# Altium PCB TankMotorTab.PcbDoc
Units mm, origin at the board's own origin, x right, y up, seen from the top; angles counter-clockwise.
Board outline 22 x 31 mm, 2 copper layers (TL, BL), stack 0.872 mm thick; 2 components, 0 nets, 2 pads, 0 vias.
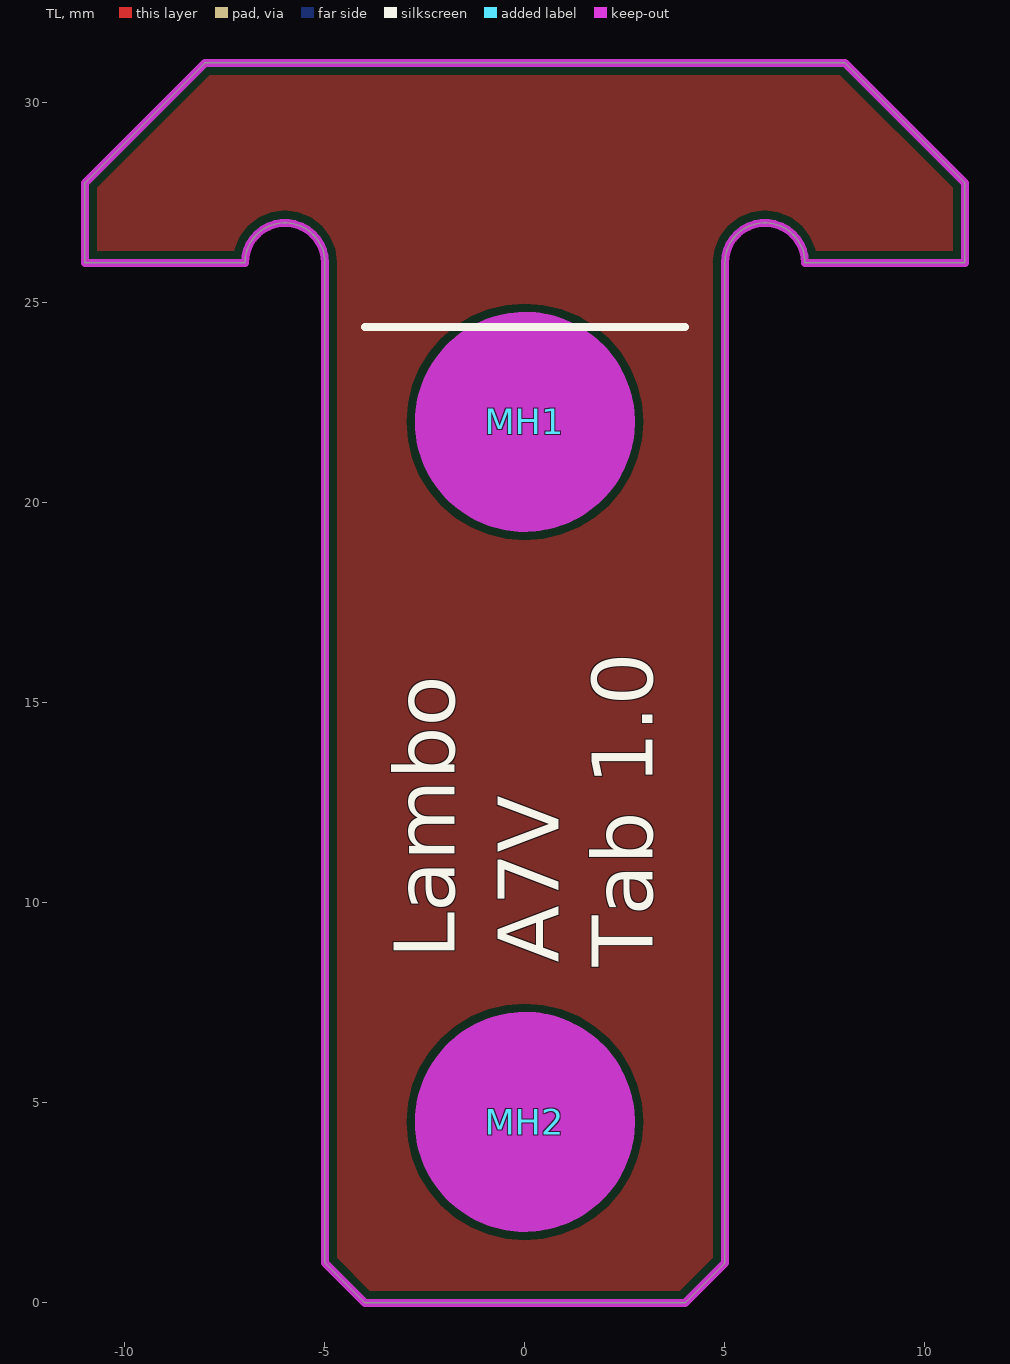
[diagram p0: TL view]
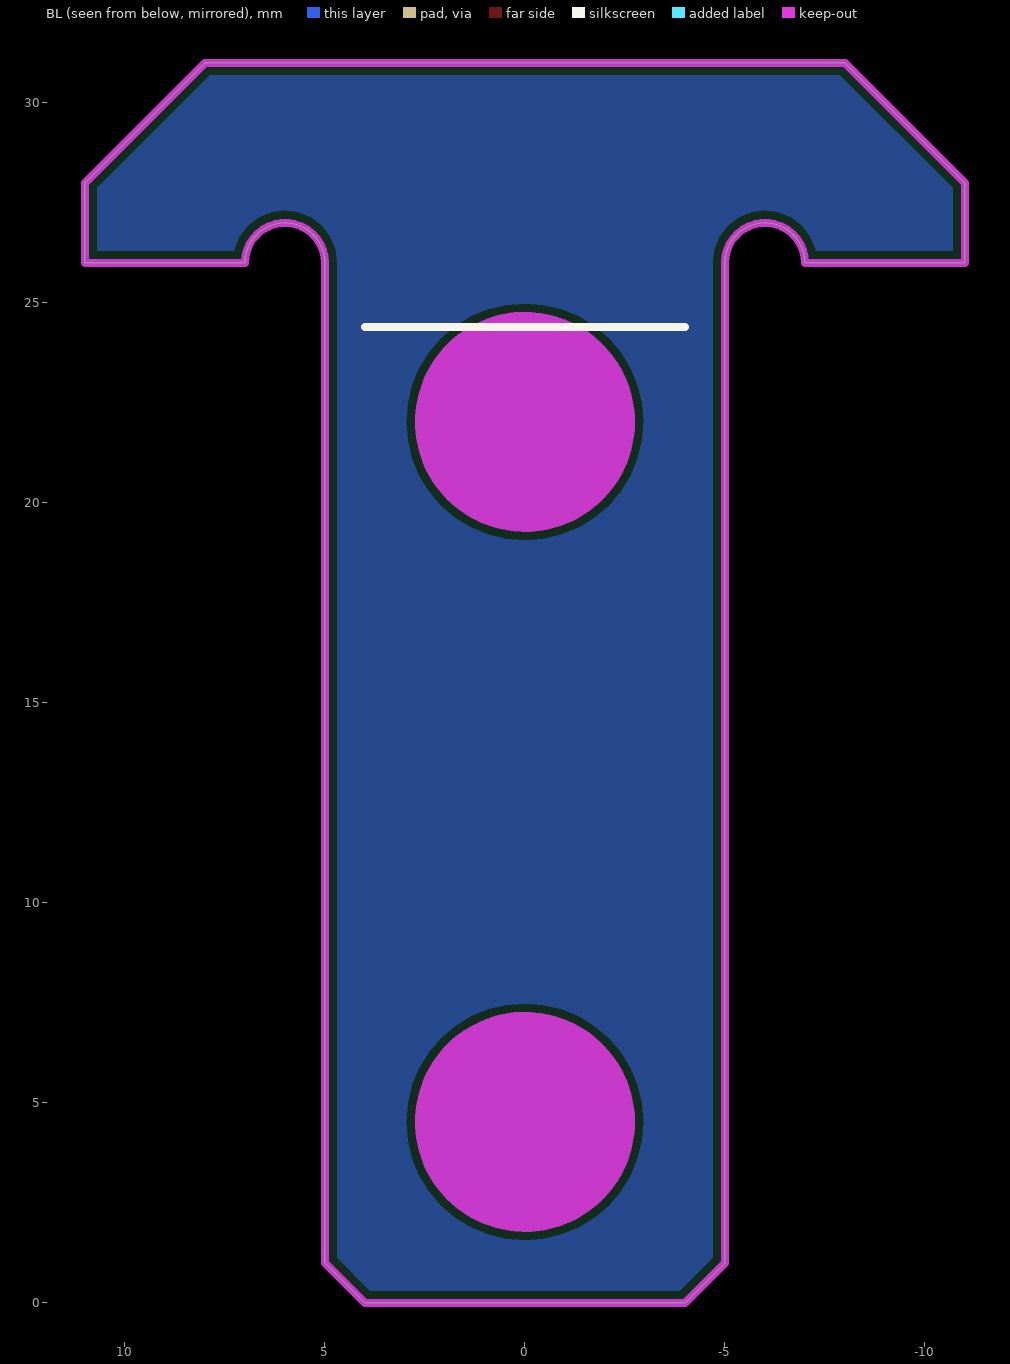
[diagram p1: BL view, seen from below]

## Layer stack, top to bottom
Top Solder: solder mask 0.01, Solder Resist, Dk 3.5
TL: signal copper 0.036
Dielectric 4: prepreg 0.8, FR-4, Dk 4.2
BL: signal copper 0.036
Bottom Solder: solder mask 0.01, Solder Resist, Dk 3.5

## Board outline
-5,1 -5,26 ccw(c-6,26) -7,26 -11,26 -11,28 -8,31 8,31 11,28 11,26 7,26 ccw(c6,26) 5,26 5,1 4,0 -4,0

## Design rules (kind name [scope] priority, off if disabled: settings)
Clearance [All] p1: gap=0.2 ignorepadtopadclearanceinfootprint=FALSE except(0: Arc-Hole Track-Hole SMDPad-Hole THPad-Hole Via-Hole Fill-Hole Poly-Hole Region-Hole Text-Hole)
DiffPairsRouting DiffPairsRouting_1 [InDifferentialPair('D')] p1: maxlimit=0.4 minlimit=0.2 mostfreqgap=0.2 toplayer_minwidth=0.2 toplayer_maxwidth=0.4 toplayer_prefwidth=0.4 bottomlayer_minwidth=0.2 bottomlayer_maxwidth=0.4 bottomlayer_prefwidth=0.4 maxuncoupledlength=12.7
DiffPairsRouting [All] p2: maxlimit=0.254 minlimit=0.254 mostfreqgap=0.254 toplayer_minwidth=0.381 toplayer_maxwidth=0.381 toplayer_prefwidth=0.381 bottomlayer_minwidth=0.381 bottomlayer_maxwidth=0.381 bottomlayer_prefwidth=0.381 maxuncoupledlength=12.7
HoleSize [All] p1: absolutevalues=TRUE maxlimit=10 minlimit=0.3 maxpercent=80.000 minpercent=20.000
MinimumSolderMaskSliver MinimumSolderMaskSliver_1 [HasFootprint('TSQFP50P900X900X160-48N_48LQFP')] p1: minsoldermaskwidth=0.08
MinimumSolderMaskSliver [All] p2: minsoldermaskwidth=0.05
PolygonConnect [All] p1: thpad.connectstyle=Relief thpad.reliefconductorwidth=0.4 thpad.reliefentries=4 thpad.polygonreliefangle="90 Angle" thpad.airgapwidth=0.254 smdpad.connectstyle=Direct smdpad.reliefconductorwidth=0.254 smdpad.reliefentries=4 smdpad.polygonreliefangle="90 Angle" smdpad.airgapwidth=0.254 via.connectstyle=Direct via.reliefconductorwidth=0.254 via.reliefentries=4 via.polygonreliefangle="90 Angle" via.airgapwidth=0.254
RoutingVias [All] p1: holewidth=0.3 width=0.7 viastyle="Through Hole" minholewidth=0.3 minwidth=0.5 maxholewidth=1 maxwidth=2
SilkToSilkClearance [All] p1: silktosilkclearance=0
SilkToSolderMaskClearance [IsPad] p1: minsilkscreentomaskgap=0.1 clearancetoexposedcopper=TRUE
SolderMaskExpansion [All] p1: expansion=0.102 istentingtop=FALSE
Width [All] p1: maxlimit=10 minlimit=0.2 preferedwidth=0.254
25 further rules are at their usual default settings.

## Components (designator, comment, footprint, x,y, rotation, side; value= is the part's Value field where it differs from the comment)
MH1 "2.5mm Non-Plated Hole" MTG250X550 0,22.025 r0 top
MH2 "2.5mm Non-Plated Hole" MTG250X550 0,4.525 r0 top

## Footprints (in the part's own frame and the unit in brackets; to place one, negate y for a bottom-side part, rotate by r counter-clockwise, add the part's x,y. Pads: shape width x height; smd on the part's side, far side on the other; paste and mask are expansions set on the pad)
MTG250X550 [mm]
  round 0 hole 2.5 unplated: ""(0,0)
  TL keep-out circle w2.75: c0,0 r1.375
  BL keep-out circle w2.75: c0,0 r1.375

## Part data
MH1 MH2: library part NONPART-007, BWA PN=NONPART-007, Display_Name="2.5mm Non-Plated Hole", Schematic Symbol=HOLE_UNPLATED

## Nets (pads, with @x,y where several pads share a name; then routed paths per layer and width w, separated by ;. In a path a pad name is that pad's centre, name@x,y a point inside that pad or via, vN(x,y) a via of type N, cw(c..) or ccw(c..) an arc to the next point about the centre after c; other vN are vias at no path point)
pads on no net: MH1. MH2.

## Polygon pours and split planes (outlines as drawn)
no net on BL "NONET_L02_P026" (solid, pour order 26): 5,26.45 5.55,27 6.409,27 7,26.409 7,26 11,26 11,28 8,31 -8,31 -11,28 -11,26 -7,26 -7,26.414 -6.414,27 -5.586,27 -5,26.414 -5,1 -4,0 4,0 5,1
no net on TL "NONET_L01_P024" (solid, pour order 24): 5,26.45 5.55,27 6.409,27 7,26.409 7,26 11,26 11,28 8,31 -8,31 -11,28 -11,26 -7,26 -7,26.414 -6.414,27 -5.586,27 -5,26.414 -5,1 -4,0 4,0 5,1
no net on Top Solder "NONET_L-01_P-001" (solid): 4,0 5,1 5,2.1 -4.99,2.1 -5,1 -4,0
no net on Top Solder "NONET_L-01_P-001" (solid): -3.995,28.1 -4.995,27.1 -4.995,24.55 4.982,24.55 5.005,27.1 4.005,28.1
no net on Bottom Solder "NONET_L-01_P-001" (solid): -3.995,28.1 -4.995,27.1 -4.995,24.55 4.982,24.55 5.005,27.1 4.005,28.1
no net on Bottom Solder "NONET_L-01_P-001" (solid): 4,0 5,1 5,2.1 -4.99,2.1 -5,1 -4,0

## Keep-outs
Keep-Out Layer:
  lines w0.2: -11,26 -11,28 -8,31 0,31 8,31 11,28 11,26 7,26 ccw(c6,26) 5,26 5,1 4,0 0,0 -4,0 -5,1 -5,26 ccw(c-6,26) -7,26 -11,26

## Silkscreen, mask and mechanical layers (free items; w line width, h text height)
Top Overlay:
  lines w0.2: -4,24.4 4,24.4
  text "Lambo" at -1.754,8.604 h1.52 r90
  text "A7V" at 0.846,8.504 h1.52 r90
  text "Tab 1.0" at 3.196,8.404 h1.52 r90
Bottom Overlay:
  lines w0.2: -4,24.4 4,24.4
MechOutline (Mech31):
  lines w0.2: -11,26 -7,26 cw(c-6,26) -5,26 -5,1 -4,0 0,0 4,0 5,1 5,26 cw(c6,26) 7,26 11,26 11,28 8,31 0,31 -8,31 -11,28 -11,26